# EAGLE board InputDevice (EAGLE 7.6.0)
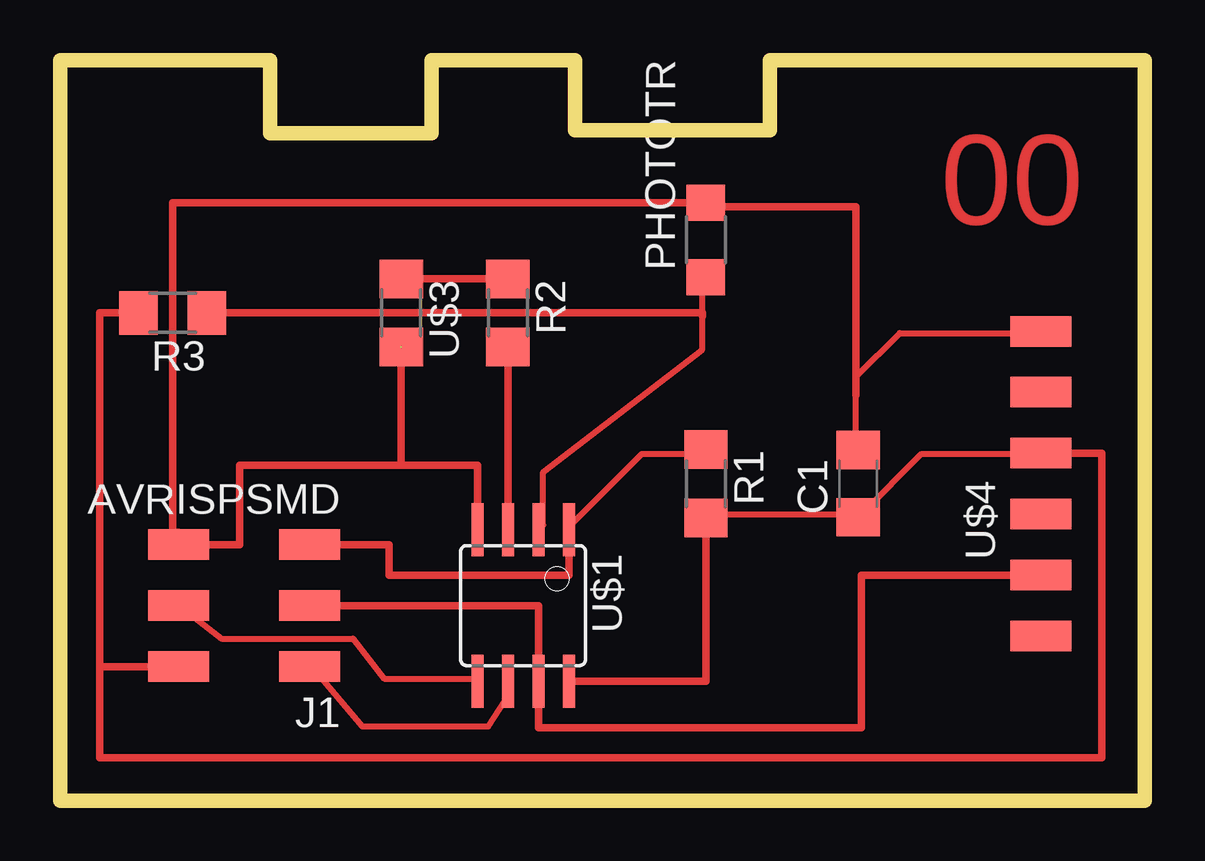
[diagram p0: board, top side]

Size 45.21 x 30.86 mm. Coordinates in mm from the lower left corner, seen from the top.
Outline: 0,30.86 0.25,0.51
Outline: 0,30.86 0,0 45.21,0 45.21,30.86 29.59,30.86 29.59,27.94 21.46,27.94 21.46,30.86 15.49,30.86 15.49,27.81 8.76,27.81 8.76,30.86 0,30.86
Copper layers (1*16): Top 0.035mm / dielectric 1.5mm / Bottom 0.035mm
Design rules "default *": minimum track width 10mil, minimum drill 24mil, track to track 16mil, track to pad 16mil, pad to pad 16mil, via to via 16mil, smd to smd 16mil, copper to edge 40mil, drill to drill 8mil, minimum pad ring 10mil, minimum via ring 8mil, stop-mask expansion 4mil, vias tented up to drill 0mil, thermal gap 10mil

## Footprints (pad centres in the part's own frame; a part is rotated, then mirrored left to right if it is on the bottom)
C1206 = smd 1.6 x 1.8: 1 -1.4,0; 2 1.4,0
2X03SMD = smd 2.54 x 1.27: 1 -2.54,2.54; 2 2.92,2.54; 3 -2.54,0; 4 2.92,0; 5 -2.54,-2.54; 6 2.92,-2.54
OP1206 = smd 1.5 x 1.6: COLLECTOR -1.55,0; EMITTER 1.55,0
R1206 = smd 1.6 x 1.803: 1 -1.422,0; 2 1.422,0
1206 = smd 1.6 x 1.803: 1 -1.422,0; 2 1.422,0
SOIC8 = smd 0.5 x 2.2: 1 -1.905,-3.154; 2 -0.645,-3.154; 3 0.625,-3.154; 4 1.895,-3.154; 5 1.905,3.154; 6 0.635,3.154; 7 -0.635,3.154; 8 -1.905,3.154
1X06SMD = smd 2.54 x 1.27: 1 0,6.35; 2 0,3.81; 3 0,1.27; 4 0,-1.27; 5 0,-3.81; 6 0,-6.35

## Placement (x,y rotation side)
C1  1uf  [C1206]  33.27,13.21 90 top
J1  AVRISPSMD  [2X03SMD]  7.87,8.13 180 top
PHOTOTR  [OP1206]  26.92,23.37 90 top
R1  10k  [R1206]  26.92,13.21 270 top
R2  499  [1206]  18.67,20.32 270 top
R3  49.9k  [1206]  4.7,20.32 180 top
U$1  ATTINY45SI  [SOIC8]  19.3,8.13 180 top
U$3  LED  [1206]  14.22,20.32 270 top
U$4  FTDI-SMD-HEADER  [1X06SMD]  40.89,13.21 0 top

## Library data of the parts
C1 = rcl
J1 U$1 U$4 = fab
PHOTOTR = 01_fab
R1 = resistor
R2 R3 U$3 = ng

## Nets
GND: C1.2 J1.6 PHOTOTR.EMITTER U$1.4 U$3.2 U$4.1
LED: R2.2 U$1.3
MISO: J1.1 U$1.6
MOSI: J1.4 U$1.5
N$1: R2.1 U$3.1
PA: PHOTOTR.COLLECTOR R3.1 U$1.2
RST: J1.5 R1.1 U$1.1
SCK: J1.3 U$1.7 U$4.5
VCC: C1.1 J1.2 R1.2 R3.2 U$1.8 U$4.3

## Tracks (layer width: path | path; a pad name or v marks a point on that pad's centre or on a via)
GND  (2 unrouted)
  Top 0.254: 27,24.74 PHOTOTR.EMITTER | C1.2 33.17,14.68 33.17,16.89 33.17,17.65 35,19.48 40.72,19.48 U$4.1
  Top 0.305: 27,24.74 33.17,24.74 33.17,16.89 | PHOTOTR.EMITTER 4.7,24.92 4.7,24.54 4.7,11.18 4.95,11.18 J1.6 7.49,10.67 7.49,13.97 14.22,13.97 | 14.22,13.97 U$3.2 14.22,19.18 | 14.22,13.97 17.41,13.97 U$1.4
LED
  Top 0.305: R2.2 18.68,18.9 U$1.3
MISO
  Top 0.254: U$1.6 18.54,4.85 18.54,4.17 17.86,3.1 12.6,3.1 10.54,5.54 J1.1
MOSI
  Top 0.254: U$1.5 17.4,5.08 13.51,5.08 12.22,6.76 6.73,6.76 5.05,8.05 J1.4
N$1
  Top 0.305: U$3.1 R2.1
PA
  Top 0.254: PHOTOTR.COLLECTOR 26.77,21.77 26.77,20.19 26.77,18.8 20.14,13.69 20.14,11.48 U$1.2
  Top 0.305: R3.1 26.77,20.32 26.77,20.19
RST
  Top 0.254: R1.1 26.77,14.45 24.26,14.45 21.29,11.48 U$1.1
  Top 0.305: J1.5 13.72,10.67 13.72,9.4 21.21,9.4 U$1.1
SCK
  Top 0.305: U$4.5 33.4,9.4 33.4,3.05 19.94,3.05 U$1.7 19.94,8.13 J1.3
VCC
  Top 0.254: R1.2 27,11.94 33.17,11.94 C1.1 33.4,11.94 35.92,14.45 40.72,14.45 U$4.3
  Top 0.305: R3.2 1.65,20.32 1.65,5.59 | J1.2 1.65,5.59 | 1.65,5.59 1.65,1.78 43.43,1.78 43.43,14.48 U$4.3 | U$1.8 26.92,4.97 R1.2

## Text on the board
Top: 00